# Altium PCB 2409_MesureTH_RefrigerateurCongelateur_6C_2L.PcbDoc
Units mm, origin at the board's own origin, x right, y up, seen from the top; angles counter-clockwise.
Board outline 62 x 46 mm, 2 copper layers (Top Layer, Bottom Layer), stack 1.586 mm thick; 80 components, 57 nets, 264 pads, 76 vias.
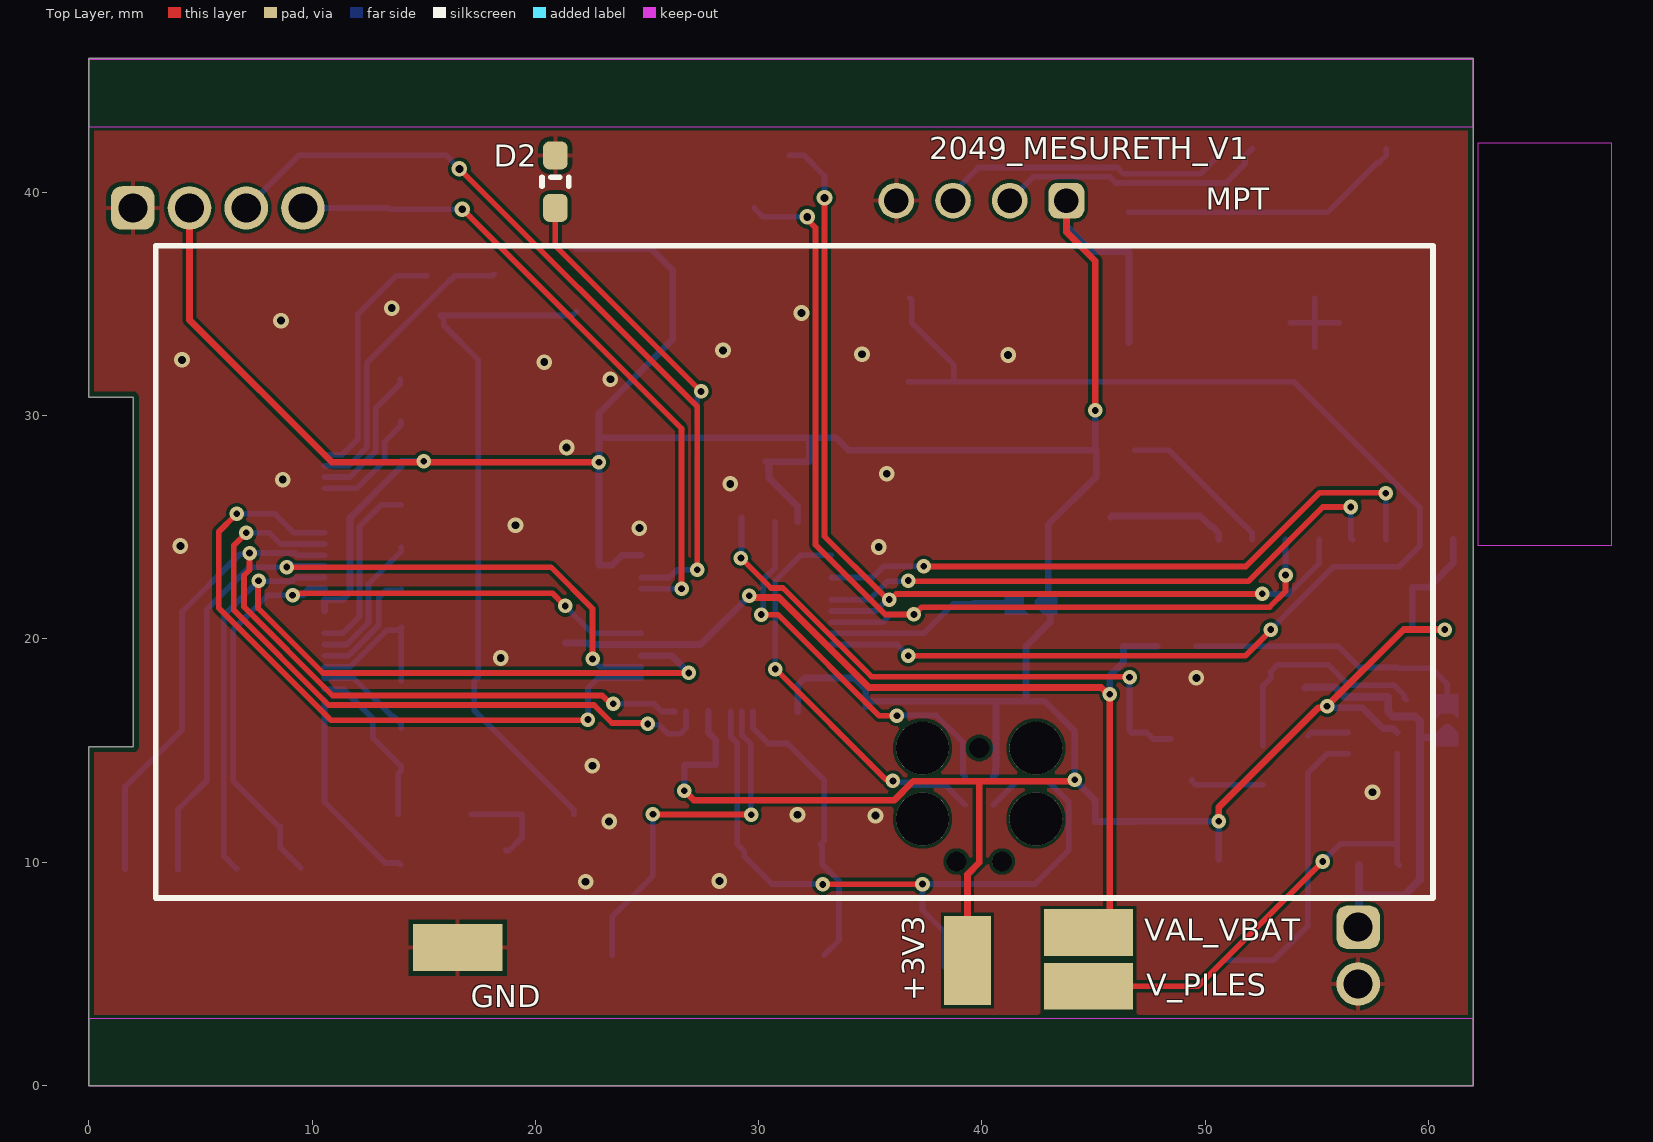
[diagram p0: Top Layer view]
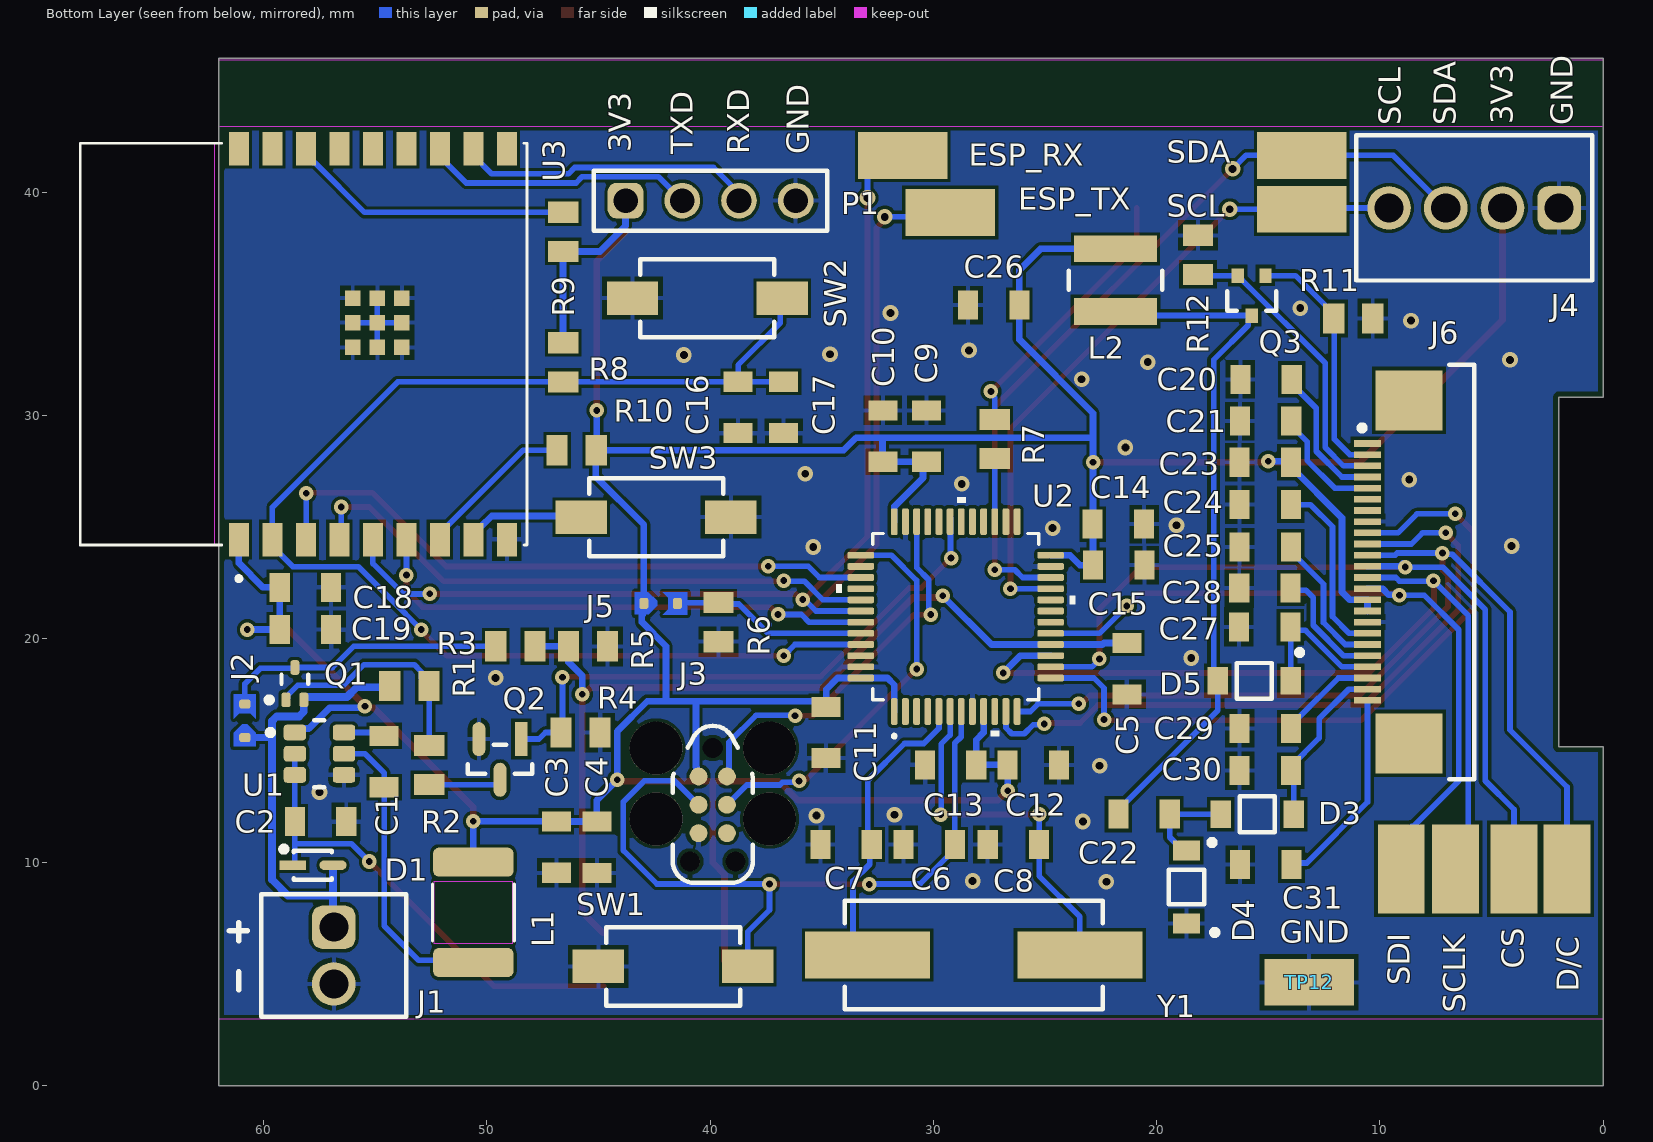
[diagram p1: Bottom Layer view, seen from below]
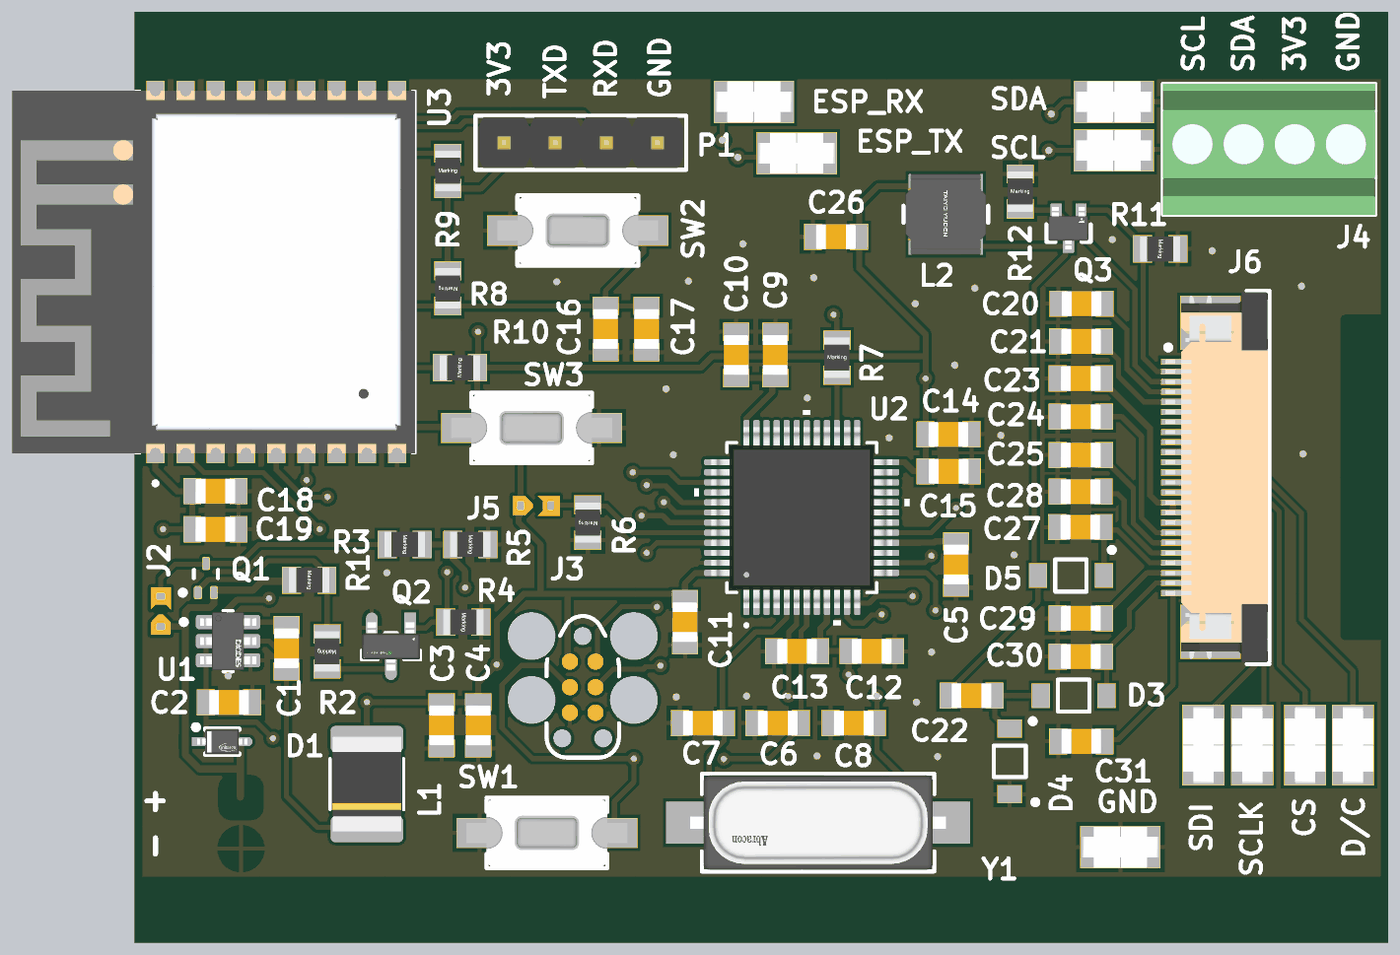
[diagram p2: 3D render of the assembled board from below, using the file's embedded part models]

## Layer stack, top to bottom
Top Solder: solder mask 0.0102, Solder Resist, Dk 3.5
Top Layer: signal copper 0.018
Dielectric1: core 1.55, FR-4, Dk 4.8
Bottom Layer: signal copper 0.018
Bottom Solder: solder mask 0.0102, Solder Resist, Dk 3.5

## Board outline
0,15.17 2,15.17 2,30.83 0,30.83 0,46 62,46 62,0 0,0

## Design rules (kind name [scope] priority, off if disabled: settings)
BoardOutlineClearance [All] p1: gap=0.25 ignorepadtopadclearanceinfootprint=FALSE except(0: Arc-SplitContinuation Track-SplitContinuation SMDPad-SplitContinuation THPad-SplitContinuation Via-SplitContinuation Fill-SplitContinuation Poly-SplitContinuation Region-SplitContinuation Text-SplitContinuation)
Clearance Clearance-xPP-xTP-xTT [All] p1: gap=0.151 ignorepadtopadclearanceinfootprint=FALSE
ComponentClearance [All] p1: gap=0.25 collisioncheckmode=3 verticalgap=0.25 showdistances=FALSE
DiffPairsRouting [All] p1: maxlimit=0.25 minlimit=0.25 mostfreqgap=0.25 toplayer_minwidth=0.381 toplayer_maxwidth=0.381 toplayer_prefwidth=0.381 bottomlayer_minwidth=0.381 bottomlayer_maxwidth=0.381 bottomlayer_prefwidth=0.381 maxuncoupledlength=12.5
Height [All] p1: minheight=0 maxheight=25 prefheight=12.5
HoleSize HoleSize-PTH [All] p1: absolutevalues=TRUE maxlimit=10 minlimit=0.25 maxpercent=80.000 minpercent=20.000
HoleToHoleClearance [All] p1: gap=0.35 allowstackedmicrovias=TRUE
MinimumAnnularRing "Minimum IAR  >0.45mm" [((ObjectKind = 'Pad') OR (ObjectKind = 'Via')) And (Layer = 'MultiLayer') And (HoleDiameter > AsMM(0.45))] p1: minimumring=0.175 // minimum inner annular ring for pads > 0.45mm finished hole size
MinimumAnnularRing "Minimum IAR <=0.45mm" [((ObjectKind = 'Pad') OR (ObjectKind = 'Via')) And (Layer = 'MultiLayer') And (HoleDiameter <= AsMM(0.45))] p2: minimumring=0.175 // minimum inner annular ring for pads <= 0.45mm finished hole size
MinimumSolderMaskSliver [All] p1: minsoldermaskwidth=0.08
PasteMaskExpansion [All] p1: expansion=-0.025
PlaneClearance PlaneClearance-IPI [All] p1: clearance=0.25
PlaneConnect [All] p1: planeconnectstyle=Relief reliefexpansion=0.175 reliefentries=4 reliefconductorwidth=0.2 reliefairgap=0.2
PolygonConnect PolygonConnect-xTW [All] p1: thpad.connectstyle=Relief thpad.reliefconductorwidth=0.2 thpad.reliefentries=4 thpad.polygonreliefangle="90 Angle" thpad.airgapwidth=0.2 smdpad.connectstyle=Relief smdpad.reliefconductorwidth=0.2 smdpad.reliefentries=4 smdpad.polygonreliefangle="90 Angle" smdpad.airgapwidth=0.2 via.connectstyle=Direct via.reliefconductorwidth=0.2 via.reliefentries=4 via.polygonreliefangle="90 Angle" via.airgapwidth=0.2
RoutingCorners [All] p1: cornerstyle=45-Degree minsetback=2.5 maxsetback=2.5
RoutingVias RoutingViasES [All] p1: holewidth=0.3 width=0.65 viastyle="Through Hole" minholewidth=0.25 minwidth=0.61 maxholewidth=0.45 maxwidth=0.8 // finishet hole size <= 0.45mm
SilkToSilkClearance [All] p1: silktosilkclearance=0.2
SilkToSolderMaskClearance SilkscreenOverComponentPads [IsPad] p1: minsilkscreentomaskgap=0.2 clearancetoexposedcopper=TRUE
SolderMaskExpansion [All] p1: expansion=0 istentingtop=FALSE
UnRoutedNet [All] p1: checkbadconnections=TRUE
Width Width-xTW [All] p1: maxlimit=1.5 minlimit=0.15 preferedwidth=0.2
17 further rules are at their usual default settings.

## Classes and differential pairs
component class "Schéma bloc": CS d/c ESP_RX ESP_TX SCLK SDI
component class "Module ESP32": C16 C17 C18 C19 P1 R8 R9 R10 SW2 SW3 U3
component class "Microcontrôleur et capteur temp": C6 C7 C8 C9 C10 C11 C12 C13 C14 C15 D2 J3 J4 J5 R6 R7 SCL SDA SW1 U2 Y1
component class E-paper: C20 C21 C22 C23 C24 C25 C26 C27 C28 C29 C30 C31 D3 D4 D5 J6 L2 Q3 R11 R12
component class Alimentation: +3V3 C1 C2 C3 C4 C5 D1 ESP GND J1 J2 L1 Q1 Q2 R1 R2 R3 R4 R5 TP12 U1 V_PILES

## Components (designator, comment, footprint, x,y, rotation, side; value= is the part's Value field where it differs from the comment)
+3V3 "Test_Point_SMD" 5019 39.35,5.6 r270 top (schematic designator TP2)
C1 "100nF / 10V" WCAP-CSGP_0805_L2W1.25H0.8_Wave 54.591,14.507 r270 bottom
C2 "10µF / 25V" WCAP-CSGP_0805_L2W1.25H0.8_Wave 57.441,11.825 r180 bottom
C3 "22µF / 25V" WCAP-CSGP_0805_L2W1.25H0.8_Wave 46.884,10.678 r270 bottom
C4 "22µF / 25V" WCAP-CSGP_0805_L2W1.25H0.8_Wave 45.071,10.675 r270 bottom
C5 "100nF / 50 V" WCAP-CSGP_0805_L2W1.25H0.8_Wave 21.336,18.669 r270 bottom
C6 "100nF / 10V" WCAP-CSGP_0805_L2W1.25H0.8_Wave 30.19,10.795 r0 bottom
C7 "22pF / 10 V" WCAP-CSGP_0805_L2W1.25H0.8_Wave 33.909,10.795 r180 bottom
C8 "22pF / 10 V" WCAP-CSGP_0805_L2W1.25H0.8_Wave 26.416,10.795 r180 bottom
C9 "4.7 µF" WCAP-CSGP_0805_L2W1.25H0.8_Wave 30.317,29.083 r90 bottom
C10 "100 nF / 10 V" WCAP-CSGP_0805_L2W1.25H0.8_Wave 32.258,29.083 r90 bottom
C11 "100 nF / 10 V" WCAP-CSGP_0805_L2W1.25H0.8_Wave 34.798,15.809 r270 bottom
C12 "1 µF" WCAP-CSGP_0805_L2W1.25H0.8_Wave 25.525,14.35 r180 bottom
C13 "10 nF / 10 V" WCAP-CSGP_0805_L2W1.25H0.8_Wave 29.231,14.35 r0 bottom
C14 "4.7 µF" WCAP-CSGP_0805_L2W1.25H0.8_Wave 21.717,25.137 r180 bottom
C15 "100 nF / 10 V" WCAP-CSGP_0805_L2W1.25H0.8_Wave 21.7,23.301 r180 bottom
C16 "1µF / 10V" WCAP-CSGP_0805_L2W1.25H0.8_Wave 38.742,30.367 r270 bottom
C17 "0.1uF / 10V" WCAP-CSGP_0805_L2W1.25H0.8_Wave 36.703,30.367 r270 bottom
C18 "10µF / 10V" WCAP-CSGP_0805_L2W1.25H0.8_Wave 58.121,22.309 r180 bottom
C19 "100nF / 10V" WCAP-CSGP_0805_L2W1.25H0.8_Wave 58.121,20.421 r180 bottom
C20 "1uF / 50V" WCAP-CSGP_0805_L2W1.25H0.8_Wave 15.103,31.627 r180 bottom
C21 "1uF / 50V" WCAP-CSGP_0805_L2W1.25H0.8_Wave 15.125,29.75 r180 bottom
C22 "4.7uF/50V" WCAP-CSGP_0805_L2W1.25H0.8_Wave 20.567,12.153 r0 bottom
C23 "1uF / 50V" WCAP-CSGP_0805_L2W1.25H0.8_Wave 15.139,27.912 r180 bottom
C24 "1uF / 50V" WCAP-CSGP_0805_L2W1.25H0.8_Wave 15.139,26.012 r180 bottom
C25 "1uF / 50V" WCAP-CSGP_0805_L2W1.25H0.8_Wave 15.139,24.112 r180 bottom
C26 "4.7uF/50V" WCAP-CSGP_0805_L2W1.25H0.8_Wave 27.3,34.95 r0 bottom
C27 "1uF/50V" WCAP-CSGP_0805_L2W1.25H0.8_Wave 15.166,20.525 r0 bottom
C28 "1uF / 50V" WCAP-CSGP_0805_L2W1.25H0.8_Wave 15.152,22.284 r180 bottom
C29 "1uF / 50V" WCAP-CSGP_0805_L2W1.25H0.8_Wave 15.139,15.999 r180 bottom
C30 "1uF / 50V" WCAP-CSGP_0805_L2W1.25H0.8_Wave 15.139,14.099 r180 bottom
C31 "1uF / 50V" WCAP-CSGP_0805_L2W1.25H0.8_Wave 15.113,9.89 r180 bottom
CS "Test_Point_SMD" 5019 4,9.7 r270 bottom (schematic designator TP6)
D1 "BAT60AE6327HTSA1" FP-PG-SOD323-2-IPC_C 57.785,9.868 r180 bottom
D2 "LED RED" LED_SMD_B_AND_R 20.9,40.475 r270 top
D3 "MBR0530-TP" ONSC-SOD-123-2-425-04_V 15.494,12.153 r0 bottom
D4 "MBR0530-TP" ONSC-SOD-123-2-425-04_V 18.669,8.89 r270 bottom
D5 "MBR0530-TP" ONSC-SOD-123-2-425-04_V 15.633,18.122 r180 bottom
D/C "Test_Point_SMD" 5019 1.625,9.7 r270 bottom (schematic designator TP5)
ESP_RX "Test_Point_SMD" 5019 31.378,41.656 r180 bottom (schematic designator TP3)
ESP_TX "Test_Point_SMD" 5019 29.25,39.102 r0 bottom (schematic designator TP4)
GND "Test_Point_SMD" 5019 16.525,6.175 r180 top (schematic designator TP13)
J1 "691210910002" 691210910002 -1213.15,-1264.18 r270 bottom
J2 "Jump_PAD" Jump_PAD 60.833,16.383 r270 bottom
J3 "ICD connector" TC2030-MCP 39.878,12.573 r270 bottom locked
J4 "691210910004" 691210910004 5.785,39.3 r0 bottom
J5 "Jump_PAD" Jump_PAD 42.164,21.59 r0 bottom
J6 "68712414022" 68712414022 8,23 r270 bottom locked
L1 "3.9uF" "Inductance 3.9uF" 50.6,7.758 r90 bottom
L2 "NRS4018T100MDGJV" FP-NR4018-MFG 21.844,36.068 r270 bottom
P1 "Embrase 4 pins" 1x4 39.975,39.625 r180 bottom
Q1 "SSM3J35AMFV,L3F" SSM3J35AMFV 58.591,17.996 r90 bottom
Q2 "BSS138" FP-318-08-IPC_B 49.403,14.605 r270 bottom
Q3 "SI1308EDL-T1-GE3" FP-5549-MFG 15.75,35.375 r270 bottom
R1 "51k" WRIS-PSMB_0805_L2W1.25H0.35 53.464,17.89 r0 bottom
R2 "51k" WRIS-PSMB_0805_L2W1.25H0.35 52.578,14.351 r90 bottom
R3 "18k" WRIS-PSMB_0805_L2W1.25H0.35 48.719,19.667 r0 bottom
R4 "100k" WRIS-PSMB_0805_L2W1.25H0.35 45.806,15.809 r0 bottom
R5 "5.1k" WRIS-PSMB_0805_L2W1.25H0.35 45.466,19.667 r0 bottom
R6 "10k" WRIS-PSMB_0805_L2W1.25H0.35 39.624,20.75 r90 bottom
R7 "750" WRIS-PSMB_0805_L2W1.25H0.35 27.25,28.948 r270 bottom
R8 "10k" WRIS-PSMB_0805_L2W1.25H0.35 46.581,32.385 r90 bottom
R9 "10k" WRIS-PSMB_0805_L2W1.25H0.35 46.581,38.227 r270 bottom
R10 "10k" WRIS-PSMB_0805_L2W1.25H0.35 45.974,28.448 r180 bottom
R11 "10k" WRIS-PSMB_0805_L2W1.25H0.35 11.2,34.35 r0 bottom
R12 "3" WRIS-PSMB_0805_L2W1.25H0.35 18.15,37.2 r270 bottom
SCL "Test_Point_SMD" 5019 13.5,39.243 r180 bottom (schematic designator TP10)
SCLK "Test_Point_SMD" 5019 6.625,9.7 r270 bottom (schematic designator TP7)
SDA "Test_Point_SMD" 5019 13.5,41.656 r180 bottom (schematic designator TP11)
SDI "Test_Point_SMD" 5019 9.05,9.7 r90 bottom (schematic designator TP8)
SW1 "434121050836" WS-TASV_L6W3.5H5_4341x10508x6 41.656,5.334 r180 bottom
SW2 "434121050836" WS-TASV_L6W3.5H5_4341x10508x6 40.124,35.26 r180 bottom
SW3 "434121050836" WS-TASV_L6W3.5H5_4341x10508x6 42.418,25.453 r180 bottom
TP12 "Test_Point_SMD" 5019 13.175,4.625 r180 bottom
U1 "AP63203WU-7" "FP-TSOT26-MFG - duplicate" 57.492,14.859 r180 bottom
U2 "STM32F072C8T6TR" LQFP48-7x7mm 29,21 r90 bottom locked
U3 "ESP32-C3-WROOM-02-N4" ESP32-C3-WROOM-02-H4 58.2,33.2 r90 bottom locked
V_PILES "Test_Point_SMD" 5019 44.772,4.445 r0 top (schematic designator TP1)
VAL_VBAT "Test_Point_SMD" 5019 44.772,6.858 r0 top (schematic designator TP9)
Y1 "8MHZ" FP-ABLS-MFG 28.19,5.842 r0 bottom

## Footprints (in the part's own frame and the unit in brackets; to place one, negate y for a bottom-side part, rotate by r counter-clockwise, add the part's x,y. Pads: shape width x height; smd on the part's side, far side on the other; paste and mask are expansions set on the pad)
1x4 [mm] "Pin Header, pitch 2.54 mm, THT, Vertical, single row, 4p"
  rrect50% 1.6x1.6 hole 1.1: 1(-3.81,0)
  round 1.6 hole 1.1: 2(-1.27,0) 3(1.27,0) 4(3.81,0)
  silkscreen extent -5.23,-1.35 5.23,1.35, body extent -5.08,-1.27 5.08,1.27, height 8.57
5019 [mm]
  rect 4x2.1 smd: 1(0,0)
  body extent -1.91,-1.01 1.91,1.01, height 2.29
68712414022 [mm] "ZIF Connectors, Horizontal, Top Contact, pitch 0.5mm, 24p"
  rect 0.3x1.2 smd: 1(-5.75,-2.56) 2(-5.25,-2.56) 3(-4.75,-2.56) 4(-4.25,-2.56) 5(-3.75,-2.56) 6(-3.25,-2.56) 7(-2.75,-2.56) 8(-2.25,-2.56) 9(-1.75,-2.56) 10(-1.25,-2.56) 11(-0.75,-2.56) 12(-0.25,-2.56) 13(0.25,-2.56) 14(0.75,-2.56) 15(1.25,-2.56) 16(1.75,-2.56) 17(2.25,-2.56) 18(2.75,-2.56) 19(3.25,-2.56) 20(3.75,-2.56) 21(4.25,-2.56) 22(4.75,-2.56) 23(5.25,-2.56) 24(5.75,-2.56)
  rect 2.7x3 smd: M1(-7.68,-0.7) M2(7.68,-0.7)
  silkscreen extent -9.27,-2.93 9.28,2.22, body extent -9.2,-2.95 9.2,2.15, height 2.1
691210910002 [mm] "2,54mm - modular - green - Horizontal wire entry - Cage clamp - 0,8mm2 wires - 02p"
  rrect50% 1.95x1.95 hole 1.3: 1(-1271.27,-1270)
  round 1.95 hole 1.3: 2(-1268.73,-1270)
  silkscreen extent -1272.74,-1273.25 -1267.26,-1266.75, body extent -1272.74,-1273.25 -1267.26,-1266.75, height 8.55
691210910004 [mm] "2,54mm - modular - green - Horizontal wire entry - Cage clamp - 0,8mm2 wires - 04p"
  rrect50% 1.95x1.95 hole 1.3: 1(-3.81,0)
  round 1.95 hole 1.3: 2(-1.27,0) 3(1.27,0) 4(3.81,0)
  silkscreen extent -5.28,-3.25 5.28,3.25, body extent -5.28,-3.25 5.28,3.25, height 8.55
ESP32-C3-WROOM-02-H4 [mm]
  rect 1.5x0.9 smd: 1(-8.75,2.9) 2(-8.75,1.4) 3(-8.75,-0.1) 4(-8.75,-1.6) 5(-8.75,-3.1) 6(-8.75,-4.6) 7(-8.75,-6.1) 8(-8.75,-7.6) 9(-8.75,-9.1) 10(8.75,-9.1) 11(8.75,-7.6) 12(8.75,-6.1) 13(8.75,-4.6) 14(8.75,-3.1) 15(8.75,-1.6) 16(8.75,-0.1) 17(8.75,1.4) 18(8.75,2.9)
  rect 0.7x0.7 smd: 9(-0.14,-4.4) 9(-0.14,-3.3) 9(-0.14,-2.2) 9(0.96,-4.4) 9(0.96,-3.3) 9(0.96,-2.2) 9(2.06,-4.4) 9(2.06,-3.3) 9(2.06,-2.2)
  Keep-Out Layer region: 9,4 -9,4 -9,10 9,10
  Keep-Out Layer region: 9,4 -9,4 -9,10 9,10
  silkscreen extent -10.6,-10 9,10, body extent -9,-10 9,10, height 3.35
FP-318-08-IPC_B [mm]
  rect 1.524x0.578 smd paste+0 mask+0: 1(-0.91,0.95)
  rrect100% 1.524x0.578 smd paste+0 mask+0: 2(-0.91,-0.95) 3(0.91,0)
  silkscreen extent -0.65,-1.45 0.65,1.45, body extent -1.2,-1.45 1.2,1.45, height 1.11
FP-5549-MFG [mm]
  rect 0.648x0.559 smd paste+0 mask+0: 1(-0.895,0.623) 2(-0.895,-0.623) 3(0.895,0)
  silkscreen extent -0.2,-1.1 0.67,1.1, body extent -1.05,-1 1.05,1, height 1.1
FP-ABLS-MFG [mm]
  rect 5.6x2.1 smd paste+0 mask+0: 1(-4.75,0) 2(4.75,0)
  silkscreen extent -5.77,-2.42 5.77,2.42, body extent -6.35,-2.35 6.35,2.35, height 4.3
FP-NR4018-MFG [mm]
  rect 1.2x3.7 smd paste+0 mask+0: 1(-1.4,0) 2(1.4,0)
  silkscreen extent -0.43,-2.1 0.43,2.1, body extent -2,-2 2,2, height 1.8
FP-PG-SOD323-2-IPC_C [mm]
  rect 1.205x0.436 smd paste+0 mask+0: 1(-0.9,0)
  rrect100% 1.205x0.436 smd paste+0 mask+0: 2(0.9,0)
  silkscreen extent -1.43,-0.65 0.85,0.84, body extent -1.25,-0.63 1.25,0.63, height 1.1
"FP-TSOT26-MFG - duplicate" [mm]
  rrect40% 1x0.7 smd paste+0 mask+0: 1(-1.099,0.95) 2(-1.099,0) 3(-1.099,-0.95) 4(1.099,-0.95) 5(1.099,0) 6(1.099,0.95)
  silkscreen extent -2.33,-1.5 0.22,1.5, body extent -1.4,-1.45 1.4,1.45, height 1
"Inductance 3.9uF" [mil]
  rrect40% 51x142 smd paste+0 mask+0: 1(-88.5,0) 2(88.5,0)
  Top Layer keep-out region: -55.12,-69 -55.12,69 55.12,69 55.12,-69
  silkscreen extent -50,-72 50,72, body extent -93,-67 93,67, height 134
Jump_PAD [mm]
  rrect50% 0.4x0.5 smd: 1(-0.7,0) 2(0.8,0)
  Top Layer region: 1.2,0.495 0.582,0.495 0.2,0.112 0.2,-0.112 0.593,-0.505 1.2,-0.505
  Top Layer region: -1.15,0.5 -0.05,0.5 -0.3,0.25 -0.3,-0.25 -0.05,-0.5 -1.15,-0.5
LED_SMD_B_AND_R [mm]
  rrect50% 1.25x1.1 smd: 1(-1.175,0) 2(1.175,0)
  silkscreen extent -0.2,-0.6 0.2,0.6, body extent -1,-0.6 1,0.6, height 0.75
LQFP48-7x7mm [mm]
  rrect50% 1.194x0.305 smd paste+0 mask+0: 1(-4.25,2.75) 2(-4.25,2.25) 3(-4.25,1.75) 4(-4.25,1.25) 5(-4.25,0.75) 6(-4.25,0.25) 7(-4.25,-0.25) 8(-4.25,-0.75) 9(-4.25,-1.25) 10(-4.25,-1.75) 11(-4.25,-2.25) 12(-4.25,-2.75) 25(4.25,-2.75) 26(4.25,-2.25) 27(4.25,-1.75) 28(4.25,-1.25) 29(4.25,-0.75) 30(4.25,-0.25) 31(4.25,0.25) 32(4.25,0.75) 33(4.25,1.25) 34(4.25,1.75) 35(4.25,2.25) 36(4.25,2.75)
  rrect50% 0.305x1.194 smd paste+0 mask+0: 13(-2.75,-4.25) 14(-2.25,-4.25) 15(-1.75,-4.25) 16(-1.25,-4.25) 17(-0.75,-4.25) 18(-0.25,-4.25) 19(0.25,-4.25) 20(0.75,-4.25) 21(1.25,-4.25) 22(1.75,-4.25) 23(2.25,-4.25) 24(2.75,-4.25) 37(2.75,4.25) 38(2.25,4.25) 39(1.75,4.25) 40(1.25,4.25) 41(0.75,4.25) 42(0.25,4.25) 43(-0.25,4.25) 44(-0.75,4.25) 45(-1.25,4.25) 46(-1.75,4.25) 47(-2.25,4.25) 48(-2.75,4.25)
  silkscreen extent -5.43,-5.35 5.35,5.35, body extent -4.5,-4.5 4.5,4.5, height 1.6
ONSC-SOD-123-2-425-04_V [mm] "SOD, 2-Leads, Body 2.69x1.6mm"
  rect 0.91x1.22 smd: 1(-1.635,0) 2(1.635,0)
  silkscreen extent -0.78,-0.8 2.16,1.39, body extent -1.35,-0.8 1.35,0.8, height 1.35
SSM3J35AMFV [mm] "SOT23, 3-Leads, Body 1,20x1,20mm, Pitch 0,40mm, IPC Medium Density"
  rrect50% 0.65x0.4 smd: 1(-0.725,0.4) 2(-0.725,-0.4) 3(0.725,0)
  silkscreen extent -0.85,-0.6 0.4,1.28, body extent -0.4,-0.6 0.4,0.6, height 0.5
TC2030-MCP [mm] "Conector ICD en placa"
  round 0.8 smd paste-0.4: 1(-1.27,-0.635) 2(-1.27,0.635) 3(0,-0.635) 4(0,0.635) 5(1.27,-0.635) 6(1.27,0.635)
  round 2.375 hole 2.375 unplated mask+0: ""(-2.54,-2.54) ""(-2.54,2.54) ""(0.635,-2.54) ""(0.635,2.54)
  round 0.85 hole 0.9 unplated mask+0: ""(-2.54,0) ""(2.54,-1.016) ""(2.54,1.016)
  silkscreen extent -3.54,-1.8 3.5,1.8, body extent -3.54,-1.8 3.5,1.8
WCAP-CSGP_0805_L2W1.25H0.8_Wave [mm] "Ceramic Capacitors, body 2x1.25mm"
  rect 0.9x1.3 smd: 1(-1.15,0) 2(1.15,0)
  body extent -1,-0.63 1,0.63, height 0.8
WRIS-PSMB_0805_L2W1.25H0.35 [mm] "Metal Plate Resistor, SMT, body size 2x1.25mm"
  rect 0.95x1.36 smd: 1(-0.875,0) 2(0.875,0)
  body extent -1,-0.62 1,0.63, height 0.35
WS-TASV_L6W3.5H5_4341x10508x6 [mm] "SMD Tact Switch, body 6x3.5mm"
  rect 2.3x1.5 smd: 1(-3.35,0) 2(3.35,0)
  silkscreen extent -3,-1.75 3,1.75, body extent -4,-1.75 4,1.75, height 5

## Part data
C1 C2 C3 C4 C5 C6 C7 C8 C9 C10 C11 C12 C13 C14 C15 C16 C17 C18 C19 C20 C21 C22 C23 C24 C25 C26 C27 C28 C29 C30 C31: library part CAPA
D1: library part CMP-32890-000004-1, "DIODE SCHOTTKY 10V 3A SOD323-2", Average Rectified Current=3A, Case/Package=SOD-323-2, Forward Voltage=370mV, Max Operating Temperature=85°C, Max Repetitive Reverse Voltage (Vrrm)=10V, Min Operating Temperature=-55°C, Peak Non-Repetitive Surge Current=5A, Contact Plating=Tin, Current Rating=3A, Element Configuration=Single, Forward Current=3A, Halogen Free="Not Halogen Free", Lead Free="Lead Free", Max Reverse Voltage (DC)=10V, Mount="Surface Mount", Number of Pins=2, Output Current=3A, Packaging="Tape and Reel", Polarity=Standard, Radiation Hardening=No, REACH SVHC="No SVHC", Voltage Rating (DC)=10V
D2: library part LED
J1: library part CMP-1502-02456-2, Current Rating=6A, Max Operating Temperature=105°C, Min Operating Temperature=-40°C, Voltage Rating=150V, Contact Material=Tin, Height=8.7mm, NexarPartId=105950649, Number of Contacts=2, Number of Rows=1
J2 J5: "jump pad smd"
J3: library part TC2030-MCP-NL, "Conector par STlinj"
J4: library part CMP-1502-02458-2, NexarPartId=105950651
J6: library part CMP-1502-01558-2, Contact Resistance=20mΩ, Current Rating=500mA, Flammability Rating="UL94 V-0", Insulation Resistance=100MΩ, Max Operating Temperature=85°C, Min Operating Temperature=-25°C, Operating Supply Voltage=50V, Actuator Material="Liquid Crystal Polymer, Polymer", Contact Location=Top, Contact Material="Bronze, Tin", Contact Plating=Tin, Gender=Receptacle, Housing Material="Liquid Crystal Polymer", Lead Pitch=500µm, Length=12.6mm, Mount="Surface Mount", NexarPartId=22802323, Number of Contacts=24, Number of Pins=24, Number of Positions=24, Number of Rows=1, Orientation=Horizontal, Packaging="Tape and Reel", Pitch=500µm, REACH SVHC=Unknown, RoHS=Compliant, Termination=Solder, Voltage Rating=50V, Width=2.1mm
L1: library part "Inductance 3.9uF", "FIXED IND 3.9UH 850MA 200 MOHM", Package="1812 EPCOS (TDK)", Check_prices=https://www.snapeda.com/parts/B82432T1392K000/EPCOS/view-part/?ref=eda, MF=EPCOS, MP=B82432T1392K000, SnapEDA_Link=https://www.snapeda.com/parts/B82432T1392K000/EPCOS/view-part/?ref=snap, Supplier 1=Digi-Key
L2: library part CMP-14484-000008-2, "SMD Power Inductors for Automotive Applications 10uH ±20% 1.2A 0.18Ω", Case/Package=Nonstandard, Current Rating=1.2A, DC Resistance (DCR)=180mR, Inductance=10uH, Max Operating Temperature=125°C, Min Operating Temperature=-40°C, Package Quantity=3500, Ratings=AEC-Q200, Resistor Type=Wirewound, Saturation Current=1.3A, Self Resonant Frequency=25MHz, Test Frequency=100kHz, Tolerance=20%, Core Material=Ferrite, Depth=4mm, Halogen Free="Halogen Free", Height=1.8mm, Height - Seated (Max)=0.071inch, Length=4mm, Max DC Current=1.2A, Mount="Surface Mount", Packaging="Tape and Reel", Radiation Hardening=No, RoHS Compliant=Yes, Shielding=Shielded, Termination=SMD/SMT, Weight=0.003527oz, Width=0.157inch
Q1: "Canal P 20 V 250mA (Ta) 150mW (Ta) Montage en surface VESM"
Q2: library part CMP-07173-000101-1, "MOSFET N-CH 50V 220MA SOT-23", Case/Package=SOT-23, Continuous Drain Current (ID)=220mA, Drain to Source Breakdown Voltage=50V, Drain to Source Resistance=3.5R, Gate to Source Voltage (Vgs)=20V, Input Capacitance=27pF, Max Operating Temperature=150°C, Max Power Dissipation=360mW, Min Operating Temperature=-55°C, On-State Resistance=6R, Package Quantity=1, Threshold Voltage=1.3V, Contact Plating=Tin, Current Rating=220mA, Drain to Source Voltage (Vdss)=50V, Dual Supply Voltage=50V, Element Configuration=Single, Fall Time=9ns, Height=0.93mm, Lead Free="Lead Free", Length=2.92mm, Mount="Surface Mount", Nominal Vgs=1.3V, Number of Elements=1, Number of Pins=3, Packaging="Tape and Reel", Power Dissipation=360mW, Radiation Hardening=No, Rds On Max=3.5R, REACH SVHC="No SVHC", Rise Time=9ns, Termination=SMD/SMT, Turn-Off Delay Time=20ns, Turn-On Delay Time=2.5ns, Voltage Rating (DC)=50V, Weight=0.03g, Width=1.3mm
Q3: library part CMP-02550-000099-2, "MOSFET N-CH 30V 1.4A SC-70-3", Case/Package=SOT-323, Continuous Drain Current (ID)=1.5A, Drain to Source Breakdown Voltage=30V, Drain to Source Resistance=132mR, Gate to Source Voltage (Vgs)=12V, Input Capacitance=105pF, Max Operating Temperature=150°C, Max Power Dissipation=500mW, Min Operating Temperature=-55°C, Package Quantity=3000, Power Dissipation=400mW, Threshold Voltage=600mV, Drain to Source Voltage (Vdss)=30V, Drain-source On Resistance-Max=132mR, Element Configuration=Single, Fall Time=8ns, Height=1mm, Lead Free="Lead Free", Length=2.2mm, Mount="Surface Mount", Number of Channels=1, Number of Elements=1, Number of Pins=3, On-State Resistance=132mR, Packaging="Tape and Reel", Polarity=N-CHANNEL, Radiation Hardening=No, Rds On Max=132mR, REACH SVHC="No SVHC", Rise Time=9ns, RoHS Compliant=Yes, Series=TrenchFET®, Turn-Off Delay Time=8ns, Turn-On Delay Time=2ns, Weight=0.004395oz, Width=1.35mm
R1 R2 R3 R4 R5 R6 R7 R8 R9 R10: library part Resistance
R11 R12: library part Res2, "Resistor", Fournisseur=ETML-ES, LatestRevisionDate=17-Jul-2002, LatestRevisionNote="Re-released for DXP Platform.", PackageDescription="Axial Device, Thru-Hole; 2 Leads; 0.4 in Pin Spacing", PackageReference=AXIAL-0.4, Published=8-Jun-2000, Publisher="Altium Limited", Ref Fournisseur="En stock"
SW1 SW2 SW3: library part CMP-1459-00008-2, Current Rating=50mA, Insulation Resistance=100MΩ, Max Operating Temperature=85°C, Min Operating Temperature=-40°C, Voltage Rating=12V, Actuator Material="Liquid Crystal Polymer, Polymer", Contact Plating=Silver, Height=5mm, Illumination Type=Non-Illuminated, Mechanical Life=50kcycles, NexarPartId=57114500, Packaging="Tape and Reel", RoHS=Compliant, Switch Function=Off-Mom, Switch Travel=250µm, Termination=SMD/SMT, Throw Configuration=SPST
U1: library part "Regulateur 3.3V", "IC REG BUCK 3.3V 2A TSOT26", Ambient Temperature Range High=+85°C, Ambient Temperature Range Low=-40°C, Manufacturer="Diodes Inc.", Max Junction Temp=+160°C, Max Supply Voltage=32V, Min Supply Voltage=3.8V, Nominal Supply Current=22uA, Output Current=2A, Output Voltage=3.3V, Package=TSOT26, Switching Frequency=1.1MHz, Temperature="to +160°C", Automotive=No, Category=IC, ComponentLink2Description=Datasheet, ComponentLink2URL=https://www.diodes.com/assets/Datasheets/AP63200-AP63201-AP63203-AP63205.pdf, Device Class L1="Integrated Circuits (ICs)", Device Class L2="Power Management ICs", Device Class L3="Voltage Regulators - Switching", Digikey Description="IC REG BUCK 3.3V 2A TSOT26", Footprint Url=https://www.diodes.com/assets/Package-Files/TSOT26.pdf, Height=1mm, Lead Free=Yes, Manufacturer Part Number=AP63203WU-7, Mouser Description="AP63203 Series 3.3 V 2 A SMT Fixed Low IQ Synchronous Buck - TSOT-26", Number Of Outputs=1, Octopart=https://octopart.com/ap63203wu-7-diodes+inc.-98099550, Output Type=Fixed, RoHS=TRUE, Standoff Height=0.01mm, Switching Topology=Buck, Temperature Range High=+160°C
U2: "ARM Cortex-M0 32-bit MCU, 64 KB Flash, 16 KB Internal RAM, 37 I/Os, 48-Pin LQFP, -40 to 85 degC, Tray", I/Os (High Current)=37, Manufacturer=STMicroelectronics, Operating Frequency(F) (Processor speed) (MHz)=48, Package Description="48-Pin Low Profile Quad Flat Package, Body 7 x 7 mm, Pitch 0.5 mm", Package Reference=LQFP48, PartNumber=STM32F072C8T6, Supply Voltage(Vcc) min (V)=2, ComponentLink1Description="Manufacturer URL", ComponentLink1URL=http://www.st.com/, ComponentLink2Description=Datasheet, ComponentLink2URL=http://www.st.com/st-web-ui/static/active/en/resource/technical/document/datasheet/DM00090510.pdf, Core="ARM Cortex-M0", D/A Converter=1, DatasheetVersion="Rev. 5", FLASH Size (Prog) (kB)=64, Internal RAM Size (kB)=16, Mounting Technology="Surface Mount", Packing=Tray
U3: "WiFi Modules (802.11) (Engineering Samples) SMD module, ESP32-C3, 4MB SPI flash, PCB antenna, -40 C +85 C", Manufacturer_Name="Espressif Systems", Mouser Part Number=356-ESP32C3WROOM02N4, Datasheet Link=https://www.mouser.ch/datasheet/2/891/Espressif_ESP32_C3_WROOM_02-2006871.pdf, Geometry.Height=3.35mm, Manufacturer_Part_Number=ESP32-C3-WROOM-02-N4, Mouser Price/Stock=https://www.mouser.co.uk/ProductDetail/Espressif-Systems/ESP32-C3-WROOM-02-N4?qs=stqOd1AaK7%2FqjTZKEOgfUg%3D%3D
Y1: library part CMP-27762-009874-1, "CRYSTAL 8.0000MHZ 18PF SMD", Case/Package=SMD/SMT, ESR (Equivalent Series Resistance)=80R, Frequency=8MHz, Frequency Stability=50ppm, Frequency Tolerance=20ppm, Load Capacitance=18pF, Max Operating Temperature=70°C, Min Operating Temperature=-20°C, Operating Frequency="8 MHz", Package Quantity=1000, Accuracy=20ppm, Contact Plating=Tin, Depth=4.7mm, Height=0.165inch, Lead Free="Lead Free", Length=11.4mm, Mount="Surface Mount", Number of Pins=2, Packaging="Tape and Reel", Radiation Hardening=No, REACH SVHC="No SVHC", Series=ABLS, Series Resistance=80R, Termination=SMD/SMT, Tolerance=20ppm, Width=4.7mm

## Via types
v1: diameter 0.65, hole 0.3, Top Layer to Bottom Layer, tented both sides, 46 vias
v2: diameter 0.7, hole 0.35, Top Layer to Bottom Layer, tented both sides, 30 vias

## Nets (pads, with @x,y where several pads share a name; then routed paths per layer and width w, separated by ;. In a path a pad name is that pad's centre, name@x,y a point inside that pad or via, vN(x,y) a via of type N, cw(c..) or ccw(c..) an arc to the next point about the centre after c; other vN are vias at no path point)
+3V3: +3V3.1 C3.1 C4.1 C9.1 C10.1 C11.1 C12.1 C13.1 C14.1 C15.1 C18.1 C19.1 C23.2 C26.1 J3.1 J4.2 J5.2 J6.15 J6.16 L1.2 L2.1 P1.1 R8.2 R9.2 R10.2 U1.1 U2.1 U2.9 U2.24 U2.36 U2.48 U3.1 | length 204.7
  Top Layer w0.3: J4.2 4.515,34.285 10.888,27.912 v1@14.962,27.912 ; v1(15,27.95) v1@14.962,27.912 ; v1(22.85,27.912) v1@14.962,27.912 ; v1(26.675,13.201) 27.095,12.781 36.076,12.781 36.919,13.624 39.878,13.624 ; +3V3.1 39.35,9.459 39.878,9.987 39.878,13.624 ; P1.1 43.785,38.215 45.074,36.926 v1(45.074,30.233) ; v1(44.15,13.7) 44.074,13.624 39.878,13.624 ; v1(50.6,11.833) 50.6,12.45 55.073,16.923 55.388,16.923 58.886,20.421 v1(60.721,20.421)
  Bottom Layer w0.3: J6.16 J6.15 11.349,21.75 11.7,22.101 11.7,25.422 13.989,27.712 C23.2 14.028,27.95 v1(15,27.95) ; L2.1 25.2,37.468 26.15,36.518 C26.1 26.15,33.408 22.85,30.108 22.85,29.01 ; U2.24 24.748,23.748 23.886,23.748 23.44,23.301 C15.1 22.85,25.12 C14.1 22.85,25.154 v1(22.85,27.912) 22.85,29.01 ; v1(26.675,13.201) C12.1 ; C12.1@26.692,14.369 28.081,14.369 28.081,15.478 27.75,15.809 U2.9 ; U2.1 31.75,17.946 32.054,18.25 U2.48 34.29,18.25 34.798,17.742 C11.1 35.048,17.209 40.629,17.209 ; U2.36 31.748,25.252 31.748,25.928 30.467,27.209 30.467,27.783 C9.1 C10.1 32.279,27.954 32.279,29.01 ; J3.1 40.609,13.939 40.609,14.248 40.629,14.269 40.629,17.209 ; P1.1 43.785,38.498 44.931,37.352 R9.2 R8.2 ; v1(45.074,30.233) 45.074,28.473 R10.2 ; L1.2@50.6,10.119 v1(50.6,11.833) 46.889,11.833 C3.1 45.074,11.828 45.069,11.833 45.069,12.781 v1(44.15,13.7) 44.15,15.87 42.811,17.209 41.975,17.209 ; v1(55.455,16.99) 55.522,16.923 57.027,16.923 57.964,15.986 58.414,15.986 U1.1 ; v1(60.721,20.421) C19.1 C18.1 60.017,22.309 61.1,23.392 U3.1 ; 22.85,29.01 32.279,29.01 ; 32.279,29.01 33.457,29.01 34.019,28.448 R10.2 ; 40.629,17.209 41.975,17.209 ; 41.975,17.209 41.975,19.67 43.055,20.75 43.055,21.05 43.014,21.091 43.014,21.54 J5.2 42.964,25.114 45.125,27.275 45.125,28.422 R10.2
+V_PILES: D1.2 J1.1 J2.2 Q1.2 R1.2 | length 20.3
  Bottom Layer w0.3: 59.612,15.583 J2.2
  Bottom Layer w0.35: R1.2@54.475,17.815 54.5,17.84 55.82,17.84 56.261,17.399 58.166,17.399 58.191,17.374 Q1.2 58.191,16.736 58.396,16.531 59.407,16.531 59.612,16.326 59.612,15.583 59.612,10.223 59.614,10.221 59.614,9.515 59.612,9.513 59.612,9.215 58.906,8.509 56.885,8.509 ; J1.1@56.885,7.112 56.885,8.509 ; D1.2 56.885,8.509
BOOTLOADER: J5.1 R6.2 U2.44 | length 8.8
  Bottom Layer w0.254: U2.44 37.395,20.25 38.712,21.567 39.566,21.567 R6.2 J5.1@41.464,21.625
GDR: J6.2 Q3.1 R11.2 | length 11.2
  Bottom Layer w0.254: J6.2 11.348,28.25 12.046,28.948 12.046,34.526 12.423,34.903 13.791,36.27 Q3.1
GND: C2.2 C3.2 C4.2 C5.2 C6.2 C7.1 C8.1 C9.2 C10.2 C11.2 C12.2 C13.2 C14.2 C15.2 C16.2 C17.2 C18.2 C19.2 C20.1 C21.1 C23.1 C24.1 C25.1 C26.2 C27.2 C28.1 C29.1 C30.1 C31.1 D2.1 D4.2 GND.1 J1.2 J3.5 J4.1 J6.8 J6.17 P1.4 Q2.2 R4.1 R5.1 R6.1 R11.1 R12.1 SW1.1 SW2.1 SW3.2 TP12.1 U1.4 U2.8 U2.23 U2.35 U2.47 U3.9 | length 4.4
  Bottom Layer w0.254: U3.9@53.8,34.16 U3.9@54.9,34.16 ; U3.9@54.9,33.06 U3.9@54.9,34.16 ; U3.9@54.9,35.26 U3.9@54.9,34.16 ; U3.9@56,34.16 U3.9@54.9,34.16
  other v2: 22.253,9.127 28.243,9.158 23.305,11.825 35.234,12.087 31.743,12.13 57.487,13.134 22.554,14.319 49.603,18.257 18.452,19.144 35.377,24.119 4.104,24.164 24.662,24.962 19.111,25.088 28.727,26.944 8.687,27.134 35.741,27.394 21.403,28.573 23.36,31.627 20.402,32.394 4.177,32.494 41.172,32.713 34.627,32.744 28.402,32.919 8.614,34.254 31.917,34.596 13.574,34.813
IO0: U3.18
IO1: U3.17
IO2: R9.1 U3.16 | length 12.9
  Bottom Layer w0.254: R9.1 55.477,39.102 57.702,41.327 57.777,41.327 58.1,41.65 U3.16
IO3: U3.15
IO4: U2.39 U3.3 | length 28.5
  Top Layer w0.254: v1(37.395,23.25) 37.404,23.241 51.816,23.241 55.118,26.543 58.066,26.543 v1(58.083,26.526)
  Bottom Layer w0.254: U2.39 35.096,22.75 35.596,23.25 v1(37.395,23.25) ; v1(58.083,26.526) 58.083,24.467 U3.3
IO5: U2.41 U3.4 | length 26.5
  Top Layer w0.254: v1(36.703,22.612) 36.735,22.58 51.936,22.58 55.264,25.908 v1(56.515,25.908)
  Bottom Layer w0.254: U2.41 34.947,21.75 35.777,22.58 36.671,22.58 v1(36.703,22.612) ; v1(56.515,25.908) 56.515,24.535 U3.4
IO8: R10.1 U3.7 | length 7.1
  Bottom Layer w0.254: R10.1 48.369,28.448 51.744,25.073 51.777,25.073 52.1,24.75 U3.7
IO9: SW3.1 U3.8 | length 5.5
  Bottom Layer w0.3: SW3.1 45.816,25.501 49.776,25.501 50.227,25.05 50.3,25.05 50.6,24.75 U3.8
IO10: U3.10
IO18: U3.13
IO19: U3.14
NetC1_1: C1.1 U1.6 | length 1.9
  Bottom Layer w0.254: C1.1 54.743,15.809 U1.6
NetC1_2: C1.2 L1.1 U1.5 | length 13.4
  Bottom Layer w0.254: L1.1@50.84,5.609 53.051,5.609 54.591,7.149 C1.2 54.591,14 55.45,14.859 U1.5
NetC2_1: C2.1 D1.1 U1.2 U1.3 V_PILES.1 | length 21.5
  Top Layer w0.254: V_PILES.1 49.676,4.445 v1(55.264,10.033)
  Bottom Layer w0.254: v1(55.264,10.033) 56.066,10.834 58.591,10.834 ; U1.2 U1.3 C2.1 58.591,10.834 ; D1.1@58.682,9.868 58.591,9.959 58.591,10.834
NetC5_1: C5.1 R3.1 R5.2 U2.16 VAL_VBAT.1 | length 42.1
  Top Layer w0.3: v1(29.578,21.928) 29.655,21.851 30.909,21.851 34.935,17.826 45.344,17.826 45.651,17.519 v1(45.72,17.519) 45.72,7.758 44.82,6.858 VAL_VBAT.1
  Bottom Layer w0.3: C5.1 22.357,19.819 22.422,19.754 23.1,19.754 23.104,19.75 U2.16 27.4,19.75 v1(29.578,21.928) ; v1(45.72,17.519) 45.72,18.338 46.341,18.959 R5.2 R3.1
NetC7_2: C7.2 U2.5 Y1.2 | length 13.4
  Bottom Layer w0.254: U2.5 29.75,15.999 30.429,15.32 31.289,15.32 32.94,13.669 32.94,10.976 C7.2 32.852,10.702 32.852,9.913 33.6,9.165 33.6,6.502 Y1.2
NetC8_2: C8.2 U2.6 Y1.1 | length 16.3
  Top Layer w0.254: v1(25.266,12.153) 25.277,12.141 29.657,12.141 v1(29.668,12.13)
  Bottom Layer w0.254: Y1.1 23.44,7.556 25.266,9.382 v1(25.266,12.153) ; U2.6 29.25,15.695 29.653,15.292 29.653,12.145 v1(29.668,12.13)
NetC16_1: C16.1 C17.1 R8.1 SW2.2 U2.45 U3.2 | length 60.1
  Top Layer w0.254: v1(36.703,19.25) 51.8,19.25 52.937,20.387 v1(52.937,20.421)
  Bottom Layer w0.254: U2.45 36.203,19.75 v1(36.703,19.25) ; C17.1 36.71,31.51 C16.1@38.735,31.51 ; SW2.2 36.852,35.182 36.852,34.16 38.742,32.27 C16.1 ; C16.1@38.742,31.51 R8.1 53.987,31.51 59.6,25.897 U3.2 59.6,24.15 58.687,23.237 55.753,23.237 54.3,21.784 v1(52.937,20.421)
NetC20_2: C20.2 J6.4 | length 6.5
  Bottom Layer w0.254: J6.4 11.701,27.25 12.856,28.405 12.856,30.33 13.953,31.427 C20.2
NetC21_2: C21.2 J6.5 | length 5.3
  Bottom Layer w0.254: J6.5 12.02,26.75 13.261,27.992 13.261,28.836 13.975,29.55 C21.2
NetC22_1: C22.1 D3.2 D4.1 | length 4.3
  Bottom Layer w0.254: D3.2 C22.1 19.417,11.118 18.824,10.525 D4.1
NetC22_2: C22.2 D5.1 L2.2 Q3.3 | length 31.1
  Bottom Layer w0.254: C22.2 21.717,12.353 17.268,16.801 D5.1 17.451,18.305 17.451,32.497 15.903,34.046 15.903,34.327 Q3.3 21.655,34.479 L2.2
NetC24_2: C24.2 J6.18 | length 8.2
  Bottom Layer w0.254: J6.18 11.375,20.25 12.128,21.003 12.128,25.028 13.112,26.012 C24.2
NetC25_2: C25.2 J6.19 | length 6.4
  Bottom Layer w0.254: J6.19 11.554,19.75 12.533,20.729 12.533,22.455 13.989,23.912 C25.2
NetC28_2: C28.2 J6.20 | length 5.4
  Bottom Layer w0.254: J6.20 11.627,19.25 12.987,20.61 12.987,21.85 13.32,22.183 13.96,22.183 C28.2@13.989,22.212
NetC29_2: C29.2 J6.22 | length 4.5
  Bottom Layer w0.254: J6.22 11.863,18.25 13.591,16.522 13.666,16.522 13.989,16.199 C29.2
NetD2_2: D2.2 R7.1 | length 12.2
  Top Layer w0.254: D2.2 20.9,37.603 v1(27.421,31.082)
  Bottom Layer w0.254: R7.1 27.256,29.829 27.256,30.81 27.421,30.975 v1(27.421,31.082)
NetJ2_1: J2.1 Q1.3 R3.2 | length 12.8
  Bottom Layer w0.254: R3.2 55.96,19.667 56.906,18.721 Q1.3 58.627,18.685 60.139,18.685 60.833,17.991 J2.1
NetJ6_9: J6.9 U2.13 | length 31.4
  Top Layer w0.254: v1(6.625,25.6) 5.825,24.8 5.825,21.386 10.854,16.358 22.326,16.358 v1(22.357,16.389)
  Bottom Layer w0.254: v1(6.625,25.6) 8.346,25.6 9.196,24.75 J6.9 ; v1(22.357,16.389) 22.357,17.795 22.812,18.25 U2.13
NetJ6_10: J6.10 U2.11 | length 30.8
  Top Layer w0.254: v1(7.055,24.75) 6.5,24.195 6.5,21.287 10.746,17.04 22.627,17.04 23.432,16.235 24.989,16.235 v1(25.03,16.194)
  Bottom Layer w0.254: v1(7.055,24.75) 8.094,24.75 8.594,24.25 J6.10 ; v1(25.03,16.194) 25.07,16.153 25.534,16.153 25.931,15.756 26.487,15.756 26.748,16.017 26.748,16.748 U2.11
NetJ6_11: D/C.1 J6.11 U2.12 | length 43.8
  Top Layer w0.254: v1(7.203,23.845) 7.203,23.09 6.952,22.838 6.952,21.439 10.923,17.468 22.997,17.468 23.374,17.091 v1(23.495,17.091)
  Bottom Layer w0.254: D/C.1 1.625,13.375 4.177,15.927 4.177,21.202 6.766,23.791 7.15,23.791 v1(7.203,23.845) 9.229,23.845 9.324,23.75 J6.11 ; v1(23.495,17.091) 25.316,17.091 25.658,16.75 U2.12
NetJ6_12: CS.1 J6.12 U2.14 | length 37.6
  Top Layer w0.254: v1(8.874,23.217) 20.699,23.217 22.564,21.352 v1(22.564,19.103)
  Bottom Layer w0.254: CS.1@4,9.675 4,12.363 5.289,13.653 5.289,21.32 7.187,23.217 8.713,23.217 v1@8.874,23.378 ; v1(22.564,19.103) 22.564,19.08 22.894,18.75 U2.14
  Bottom Layer w0.3: v1(8.874,23.217) 8.874,23.378 8.982,23.378 9.11,23.25 J6.12
NetJ6_13: J6.13 SCLK.1 U2.15 | length 41.2
  Top Layer w0.254: v1(7.607,22.606) 7.58,22.578 7.58,21.384 10.489,18.475 v1(26.875,18.475)
  Bottom Layer w0.254: SCLK.1@6.625,9.705 6.05,10.28 6.05,21.048 7.072,22.071 v1(7.607,22.606) ; v1@7.535,22.678 7.608,22.75 7.673,22.75 7.834,22.589 9.134,22.589 9.295,22.75 J6.13
  Bottom Layer w0.3: U2.15 26.1,19.25 v1(26.875,18.475)
NetJ6_14: J6.14 SDI.1 U2.17 | length 33.2
  Top Layer w0.254: v1(9.128,21.961) 9.212,22.045 20.768,22.045 v1(21.336,21.478)
  Bottom Layer w0.254: v1(9.128,21.961) 8.022,21.961 6.475,20.414 6.475,13.642 8.505,11.612 8.577,11.612 8.577,10.662 SDI.1@9.5,9.739 ; v1(21.336,21.478) 22.564,20.25 U2.17
  Bottom Layer w0.3: v1(9.128,21.961) 9.142,21.975 9.61,21.975 9.884,22.25 J6.14
NetQ1_1: Q1.1 R1.1 R2.2 | length 10.4
  Bottom Layer w0.254: R2.2 52.578,17.879 52.937,18.238 52.937,18.536 53.249,18.848 55.496,18.848 56.425,17.919 58.468,17.919 58.918,17.469 58.918,17.344 Q1.1
NetQ2_1: Q2.1 R4.2 U2.31 | length 25.9
  Top Layer w0.254: v1(29.21,23.622) 30.553,22.279 31.086,22.279 35.053,18.313 46.584,18.313 v1(46.609,18.288)
  Bottom Layer w0.254: v1(29.21,23.622) 29.23,23.642 29.23,25.433 U2.31@29.25,25.453 ; v1(46.609,18.288) 46.609,15.881 R4.2 47.371,15.809 47.665,15.515 Q2.1
NetQ2_3: Q2.3 R2.1 | length 3.3
  Bottom Layer w0.254: Q2.3 49.403,13.626 49.553,13.476 R2.1
NetR7_2: R7.2 U2.27 | length 2.8
  Bottom Layer w0.254: U2.27 R7.2
NetTP3_1: ESP_RX.1 U2.42 U3.5 | length 46.1
  Top Layer w0.254: v2(32.95,39.75) 32.95,24.593 35.534,22.009 ; v1@35.814,21.928 35.615,21.928 35.778,21.765 v1(35.85,21.765) ; v1@35.881,21.729 36.161,22.009 52.535,22.009 v1(52.554,22.028)
  Bottom Layer w0.254: ESP_RX.1 32.027,41.656 32.95,40.733 v2(32.95,39.75) ; U2.42 35.259,21.25 35.774,21.765 v1(35.85,21.765) ; v1(52.554,22.028) 52.573,22.009 53.734,22.009 55.1,23.375 U3.5
NetTP4_1: ESP_TX.1 U2.43 U3.6 | length 46.3
  Top Layer w0.254: v2(32.175,38.9) 32.175,38.779 32.545,38.409 32.545,24.217 35.667,21.095 36.974,21.095 37.304,21.425 52.884,21.425 53.594,22.135 v1(53.594,22.86)
  Bottom Layer w0.254: ESP_TX.1@29.8,39.3 30.2,38.9 v2(32.175,38.9) ; U2.43 35.565,20.75 35.911,21.095 v1(36.957,21.095) ; v1(53.594,22.86) 53.594,24.444 U3.6
NetU2_2: U2.2
NRST: C6.1 J3.3 SW1.2 U2.7 | length 32.9
  Top Layer w0.254: v1(32.872,9.004) 32.886,9.018 37.331,9.018 v1(37.338,9.025)
  Bottom Layer w0.254: U2.7 28.75,15.623 29.04,15.333 C6.1 29.363,10.472 29.363,10.259 30.597,9.025 32.852,9.025 v1(32.872,9.004) ; SW1.2 38.306,6.892 37.338,7.86 v1(37.338,9.025) 42.38,9.025 43.884,10.529 43.884,12.707 42.943,13.647 41.587,13.647 J3.3
PREVGH: C27.1 D5.2 J6.21 | length 6.4
  Bottom Layer w0.254: J6.21 11.7,18.75 13.334,20.384 13.876,20.384 C27.1 ; C27.1@13.989,20.312 13.989,18.131 D5.2
PREVGL: C30.2 D3.1 J6.23 | length 7.6
  Bottom Layer w0.254: J6.23 11.401,17.75 12.726,16.425 12.726,15.562 13.989,14.299 C30.2 13.859,13.968 D3.1
RESE: J6.3 Q3.2 R12.2 | length 13.4
  Bottom Layer w0.254: J6.3 11.628,27.75 12.451,28.573 12.451,32.349 16.175,36.073 16.22,36.073 16.372,36.226 Q3.2 18.095,36.27 R12.2
RXD: P1.3 U3.11 | length 13.5
  Bottom Layer w0.254: P1.3 38.705,39.964 39.849,41.108 46.058,41.108 46.341,40.825 49.775,40.825 50.6,41.65 U3.11
SCL: J4.4 SCL.1 U2.21 | length 30
  Top Layer w0.254: v2(16.732,39.243) 26.55,29.425 v1(26.55,22.25)
  Bottom Layer w0.254: J4.4 13.443,39.3 SCL.1 v2(16.732,39.243) ; U2.21 v1(26.55,22.25)
SDA: J4.3 SDA.1 U2.22 | length 35.8
  Top Layer w0.254: v2(16.6,41.05) 27.256,30.394 v1(27.256,23.101)
  Bottom Layer w0.254: J4.3 9.411,41.656 SDA.1 15.994,41.656 v2(16.6,41.05) ; U2.22 26.002,22.75 26.353,23.101 v1(27.256,23.101)
SWCLK: J3.4 U2.37 | length 18
  Top Layer w0.254: v1(30.749,18.65) 35.673,13.727 35.93,13.727 v1(36.016,13.641)
  Bottom Layer w0.254: v1(30.749,18.65) 30.749,22.621 31.878,23.75 U2.37 ; v1(36.016,13.641) 36.068,13.589 36.747,13.589 36.874,13.462 38.354,13.462 J3.4
SWDIO: J3.2 U2.34 | length 17.4
  Top Layer w0.254: v1(30.121,21.09) 30.865,21.09 35.397,16.558 v1(36.195,16.558)
  Bottom Layer w0.254: v1(30.121,21.09) 30.206,21.175 30.206,22.651 30.75,23.195 U2.34 ; v1(36.195,16.558) 36.216,16.579 37.945,16.579 39.15,15.374 39.15,13.936 J3.2
TXD: P1.2 U3.12 | length 12.3
  Bottom Layer w0.254: P1.2 42.323,40.703 45.72,40.703 46.003,40.42 50.92,40.42 51.777,41.277 51.777,41.627 U3.12
VCOM: C31.2 J6.24 | length 9.1
  Bottom Layer w0.254: J6.24 10.56,12.69 13.281,9.97 13.883,9.97 C31.2
pads on no net: J3. J3.6 J6.1 J6.6 J6.7 J6.M1 J6.M2 U2.3 U2.4 U2.10 U2.18 U2.19 U2.20 U2.25 U2.26 U2.28 U2.29 U2.30 U2.32 U2.33 U2.38 U2.40 U2.46

## Polygon pours and split planes (outlines as drawn)
GND on Top Layer "GND_L01_P000" (solid, pour order 0): 0,15.17 2,15.17 2,30.83 0,30.83 0,46 62,46 62,0 0,0
GND on Bottom Layer "GND_L02_P003" (solid, pour order 3): 0,15.17 2,15.17 2,30.83 0,30.83 0,46 62,46 62,0 0,0

## Keep-outs
Keep-Out Layer:
  rectangle: 0,0 62,3
  rectangle: 0,42.925 62,45.925

## Silkscreen, mask and mechanical layers (free items; w line width, h text height)
Top Overlay:
  lines w0.254: 3,8.4 60.2,8.4 60.2,37.6 3,37.6 3,8.4
  text "2049_MESURETH_V1" at 37.649,41.471 h1
  text "MPT" at 50.025,39.225 h1
Bottom Overlay:
  lines w0.254: 60.72,6.925 61.52,6.925 ; 61.1,4.284 61.1,5.084 ; 61.1,6.49 61.1,7.29
  text "3V3" at 4.05,43.05 h1 r270
  text "GND" at 1.375,43 h1 r270
  text "SDA" at 6.6,43 h1 r270
  text "SCL" at 9.074,43 h1 r270
  text "3V3" at 43.55,41.8 h1 r270
  text "GND" at 35.577,41.7 h1 r270
  text "RXD" at 38.25,41.7 h1 r270
  text "TXD" at 40.772,41.7 h1 r270
  text "GND" at 14.478,6.405 h1
Outline:
  the board outline again, w0.254

## Dimensions
2,30.83 to 2,15.17 on Top Dimensions
2,30.83 to 0,30.83 on Top Dimensions
0,46 to 0,30.83 on Top Dimensions
62,46 to 62,0 on Top Dimensions
62,46 to 0,46 on Top Dimensions